# Altium PCB LowerPlumbingBayBoardPCB.PcbDoc (part 1 of 2)
Units mm, origin at the board's own origin, x right, y up, seen from the top; angles counter-clockwise.
Board outline 88.9 x 76.2 mm, 4 copper layers (Top Layer, GND, PWR, Bottom Layer), stack 1.586 mm thick; 63 components, 48 nets, 259 pads, 203 vias.
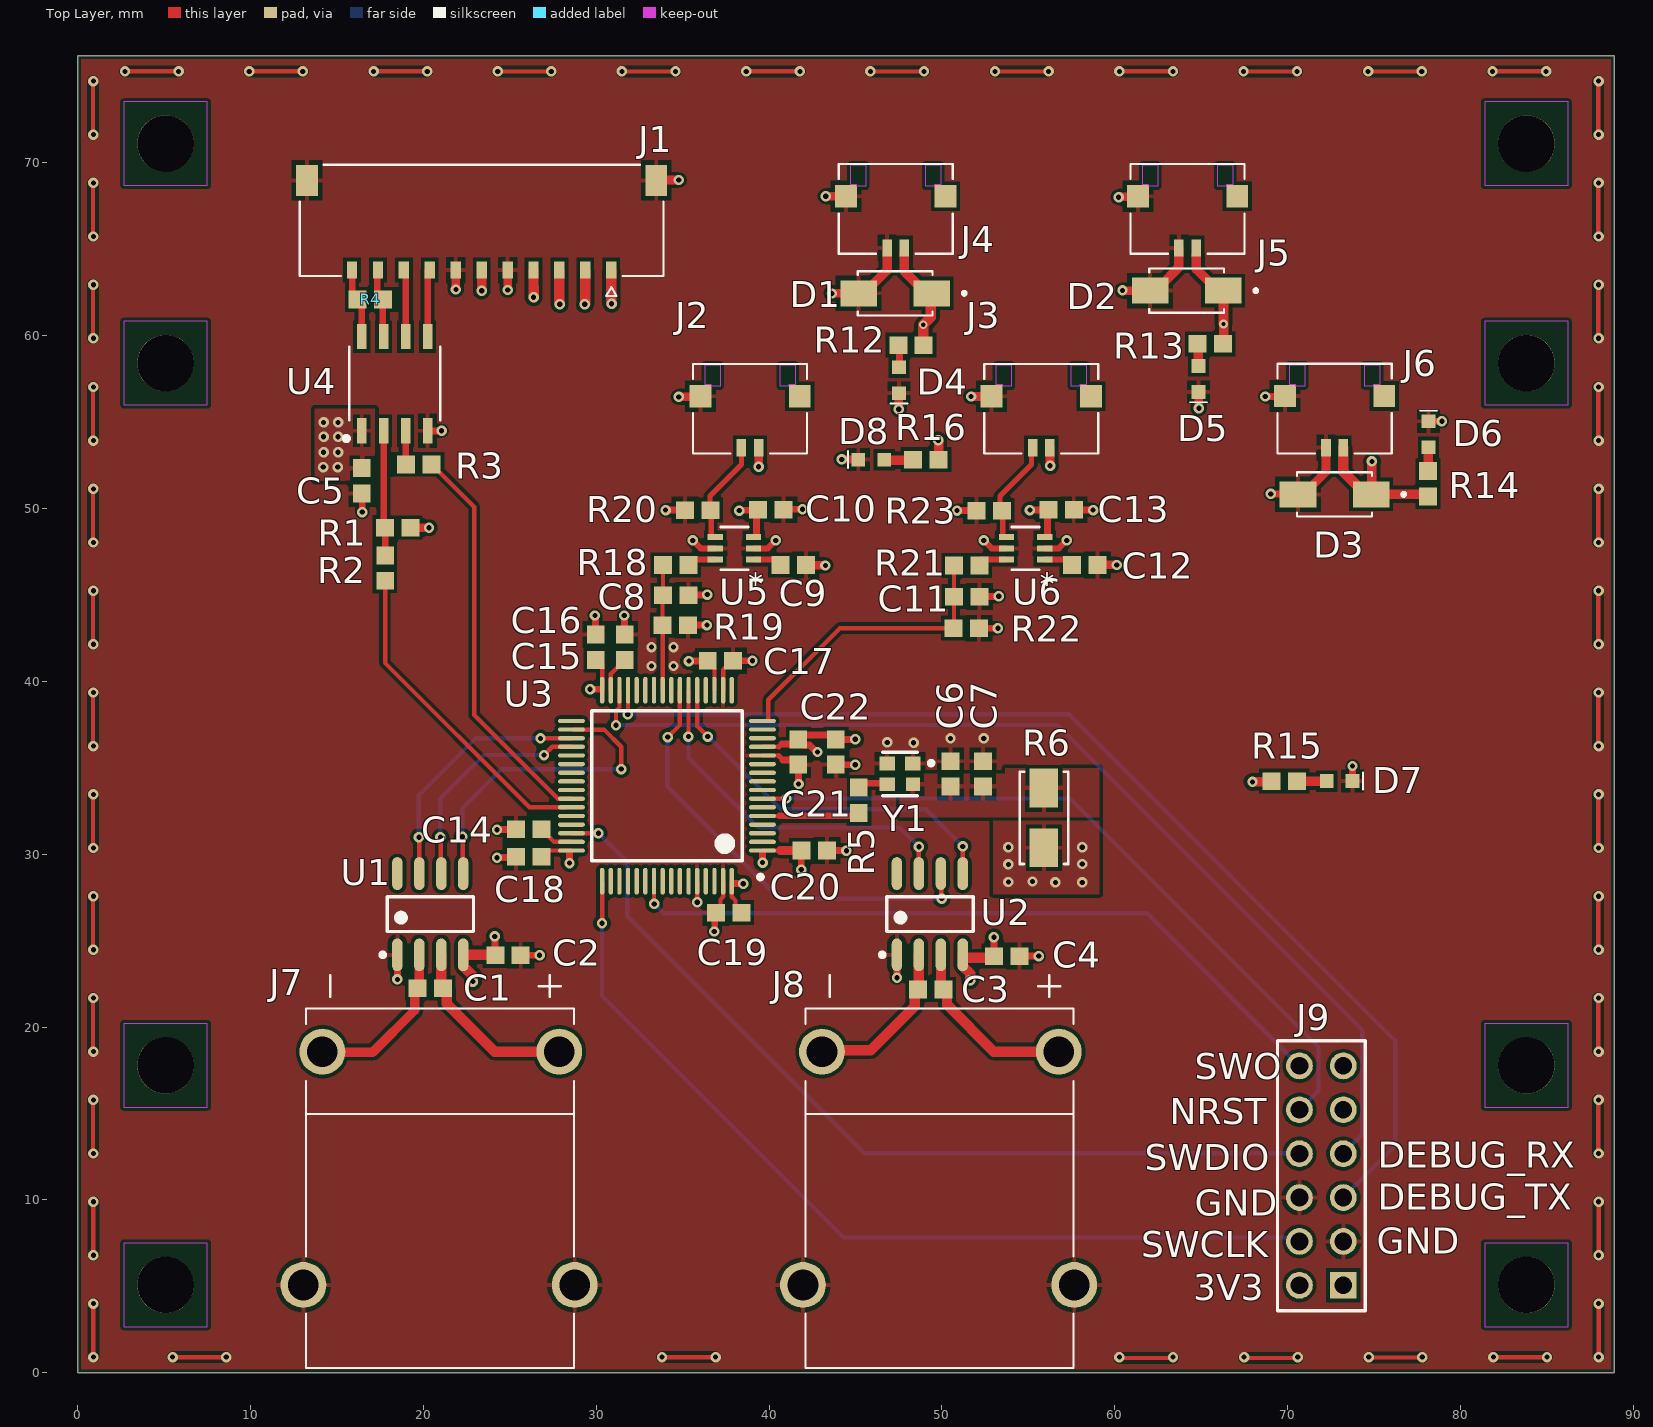
[diagram p0: Top Layer view]
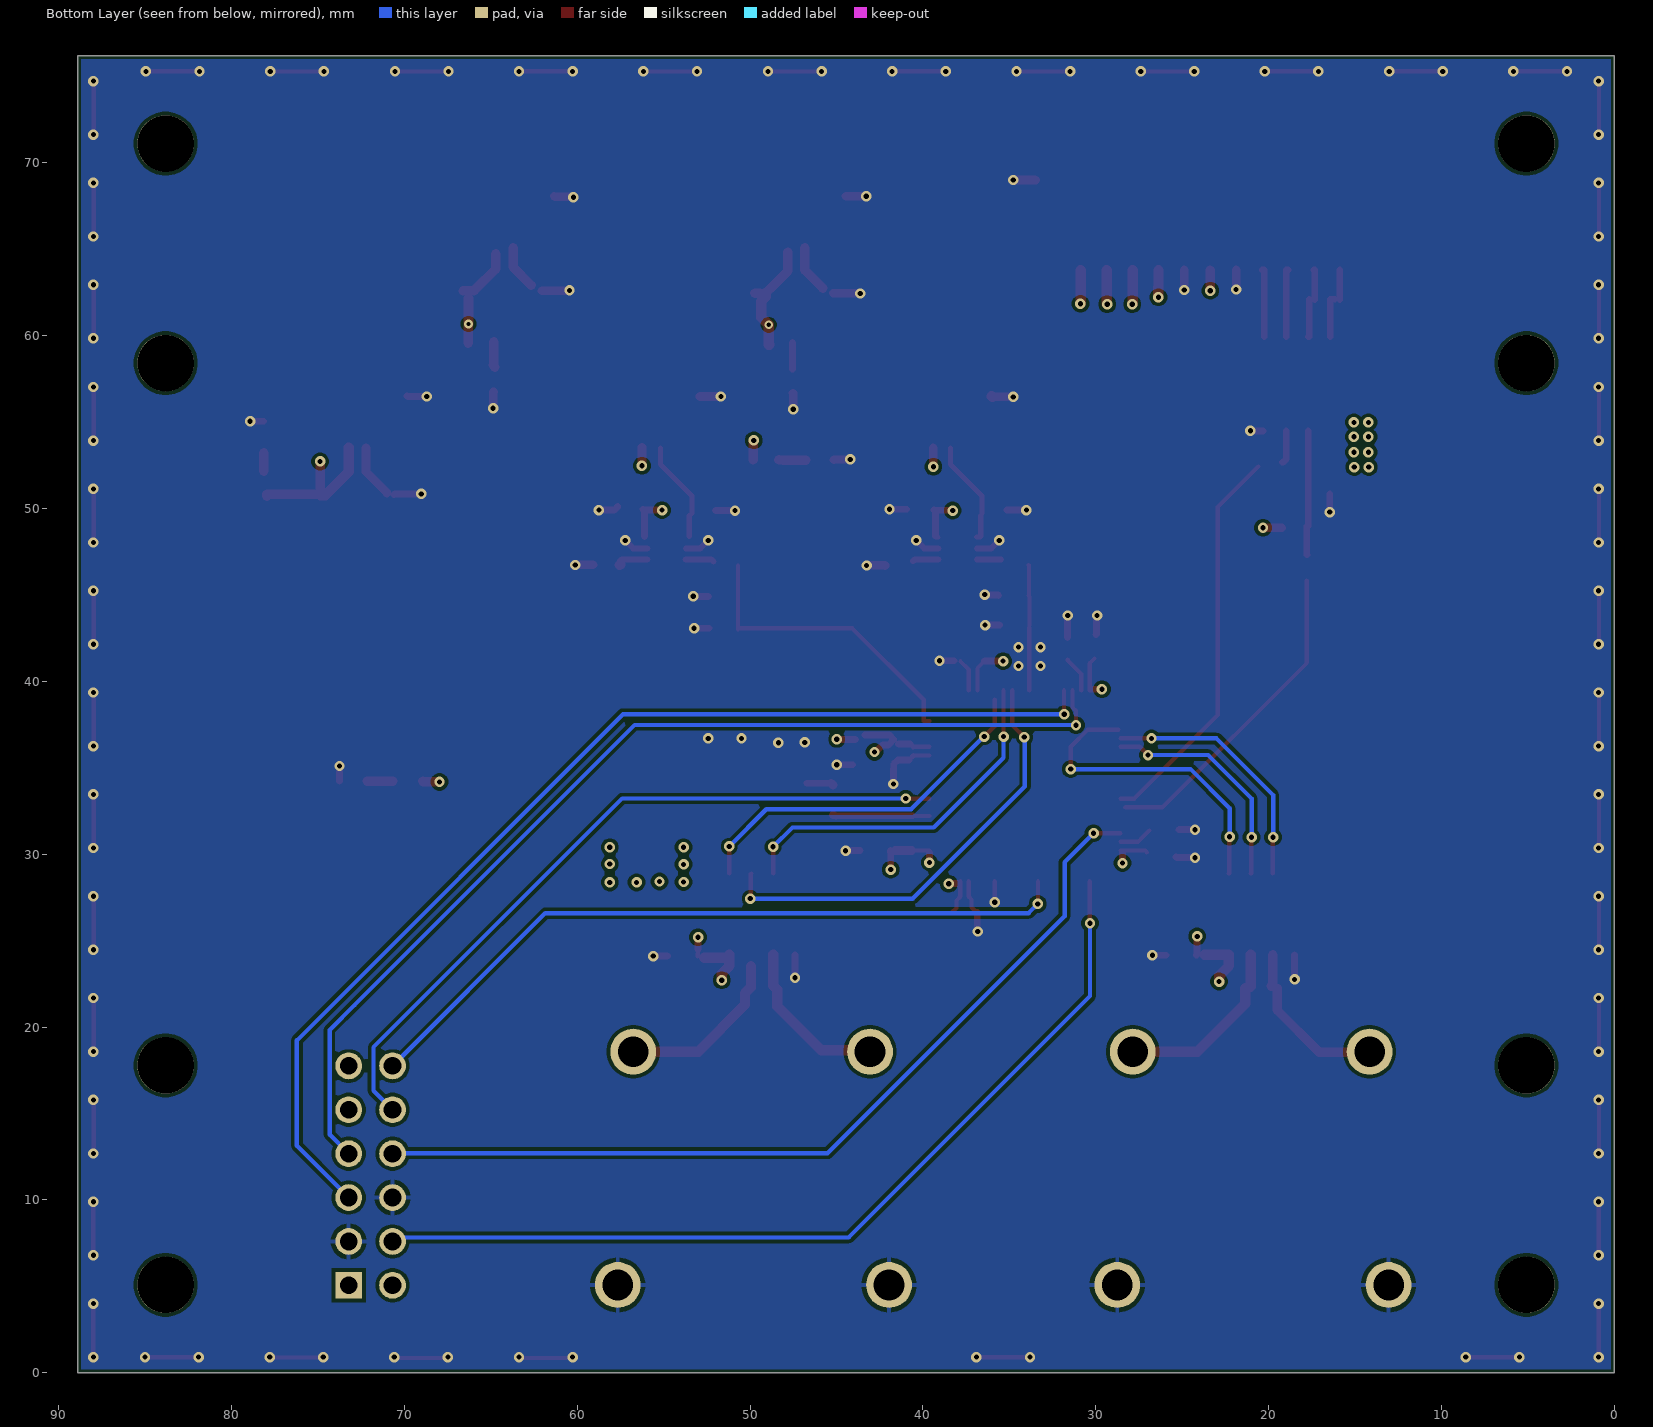
[diagram p1: Bottom Layer view, seen from below]
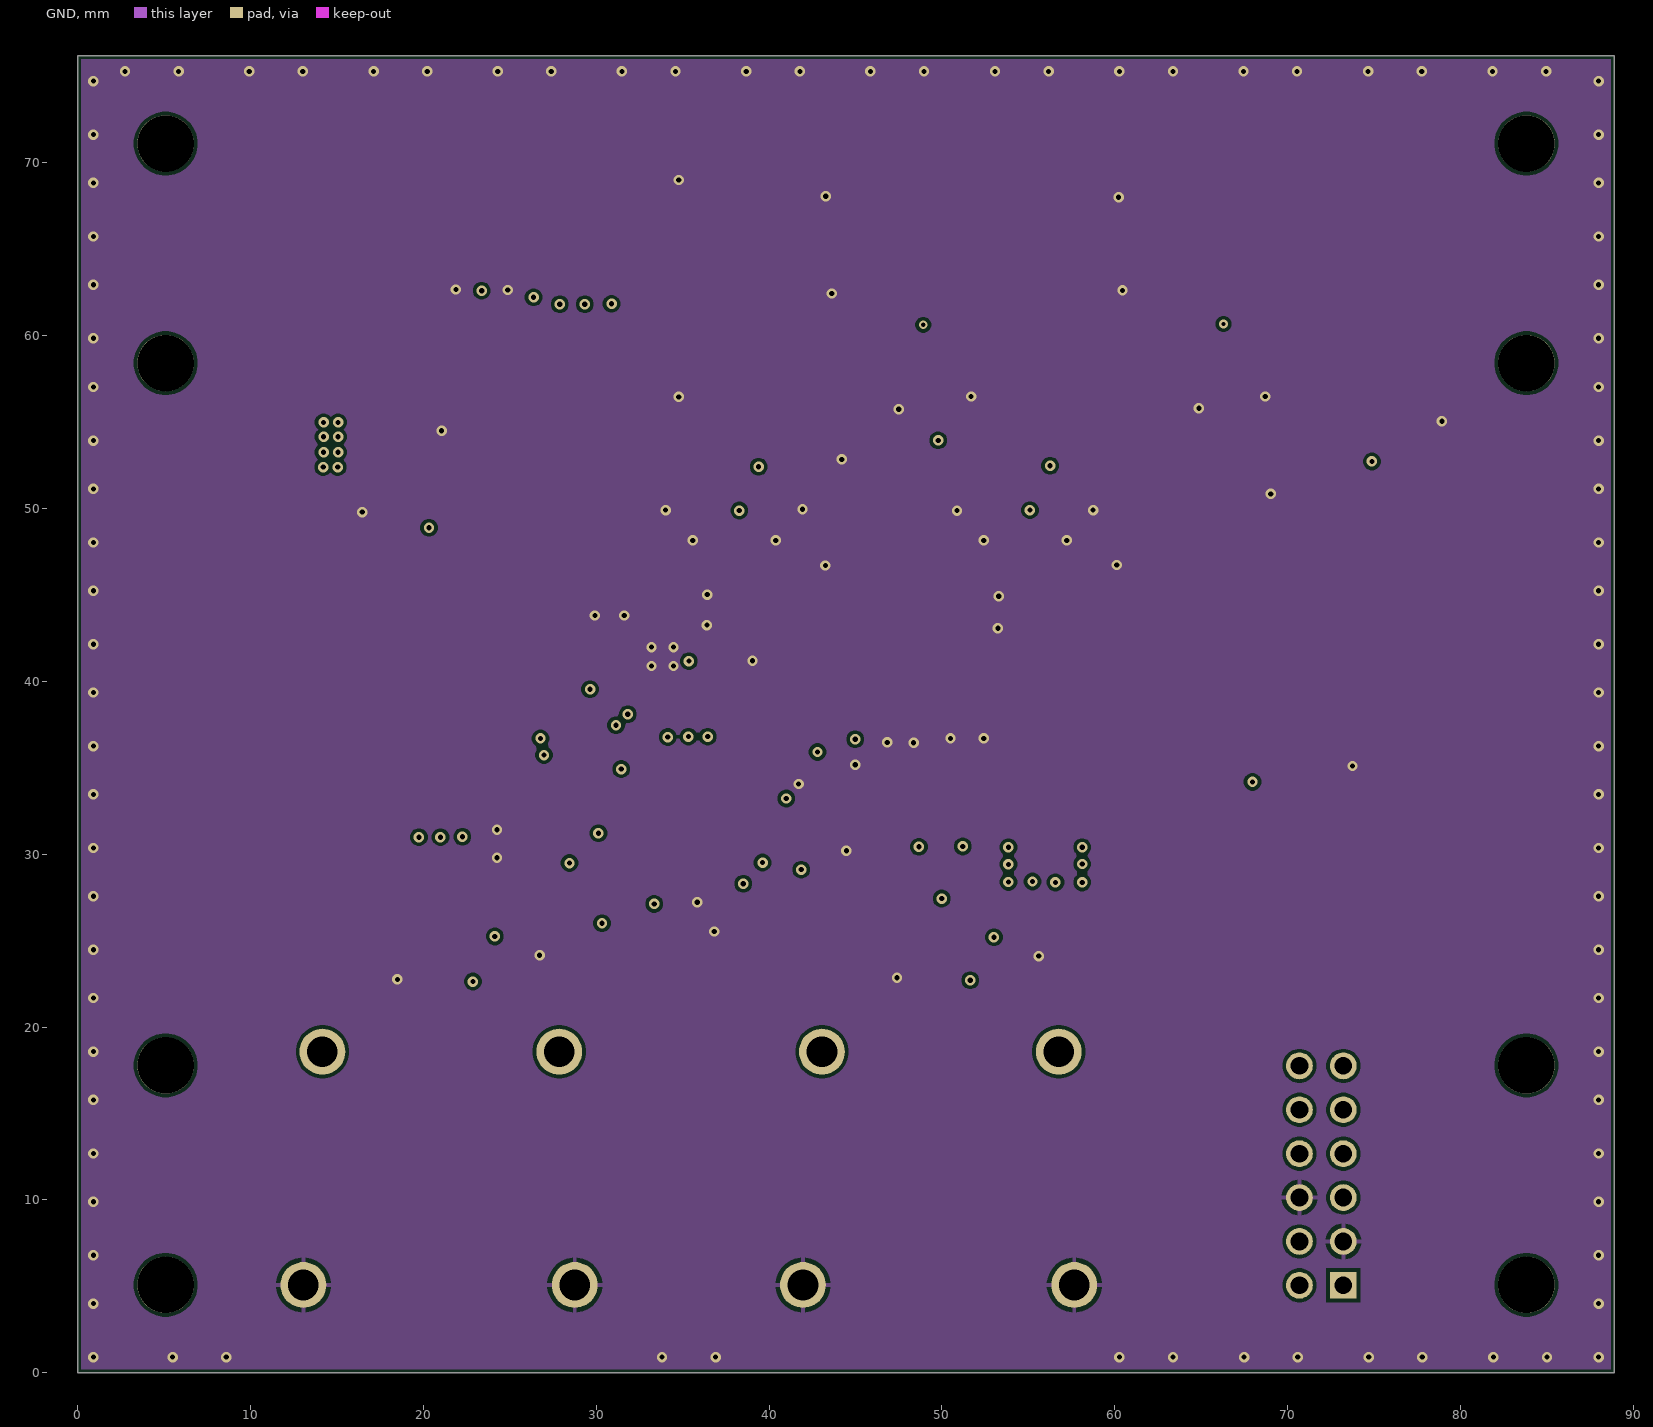
[diagram p2: GND]
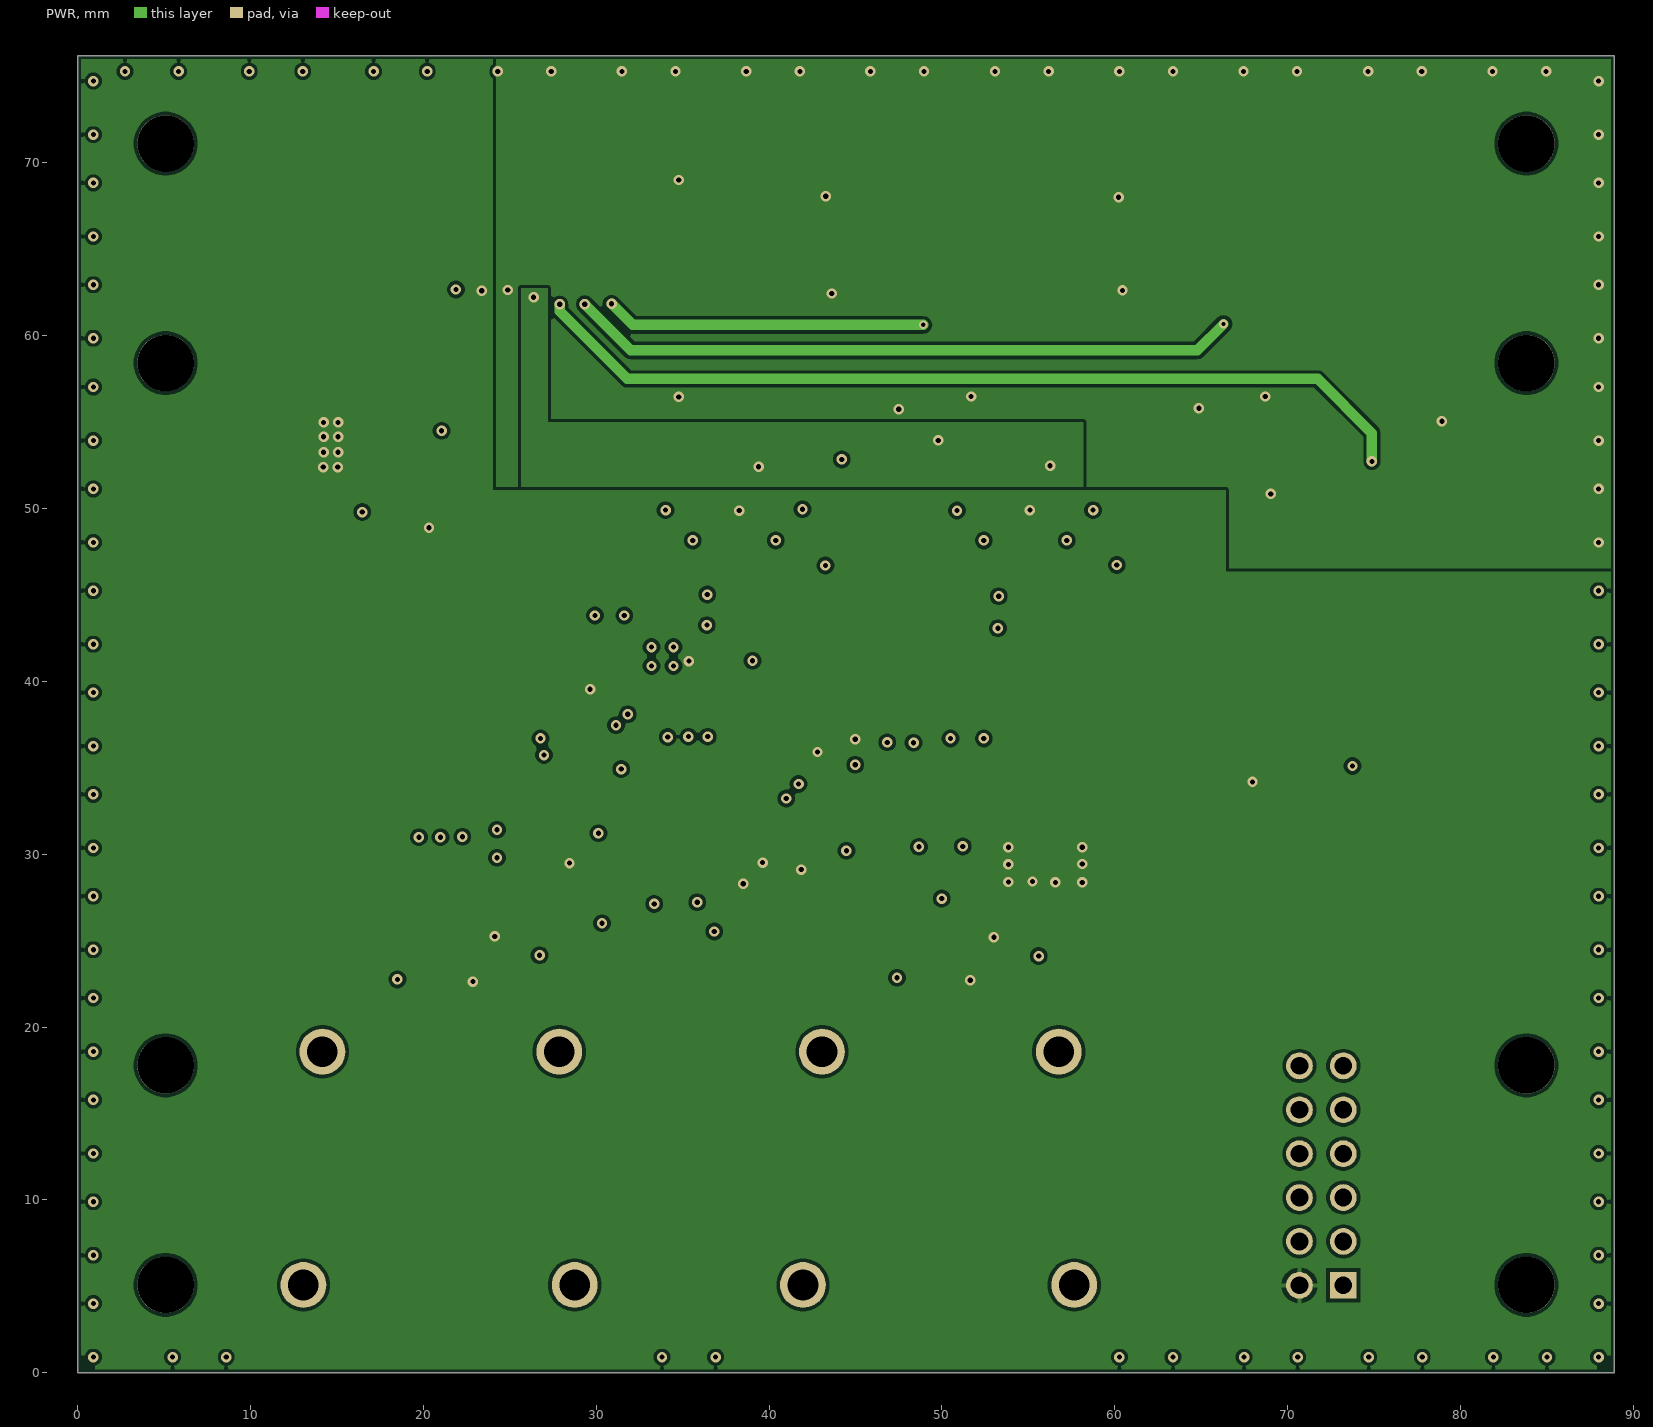
[diagram p3: PWR]
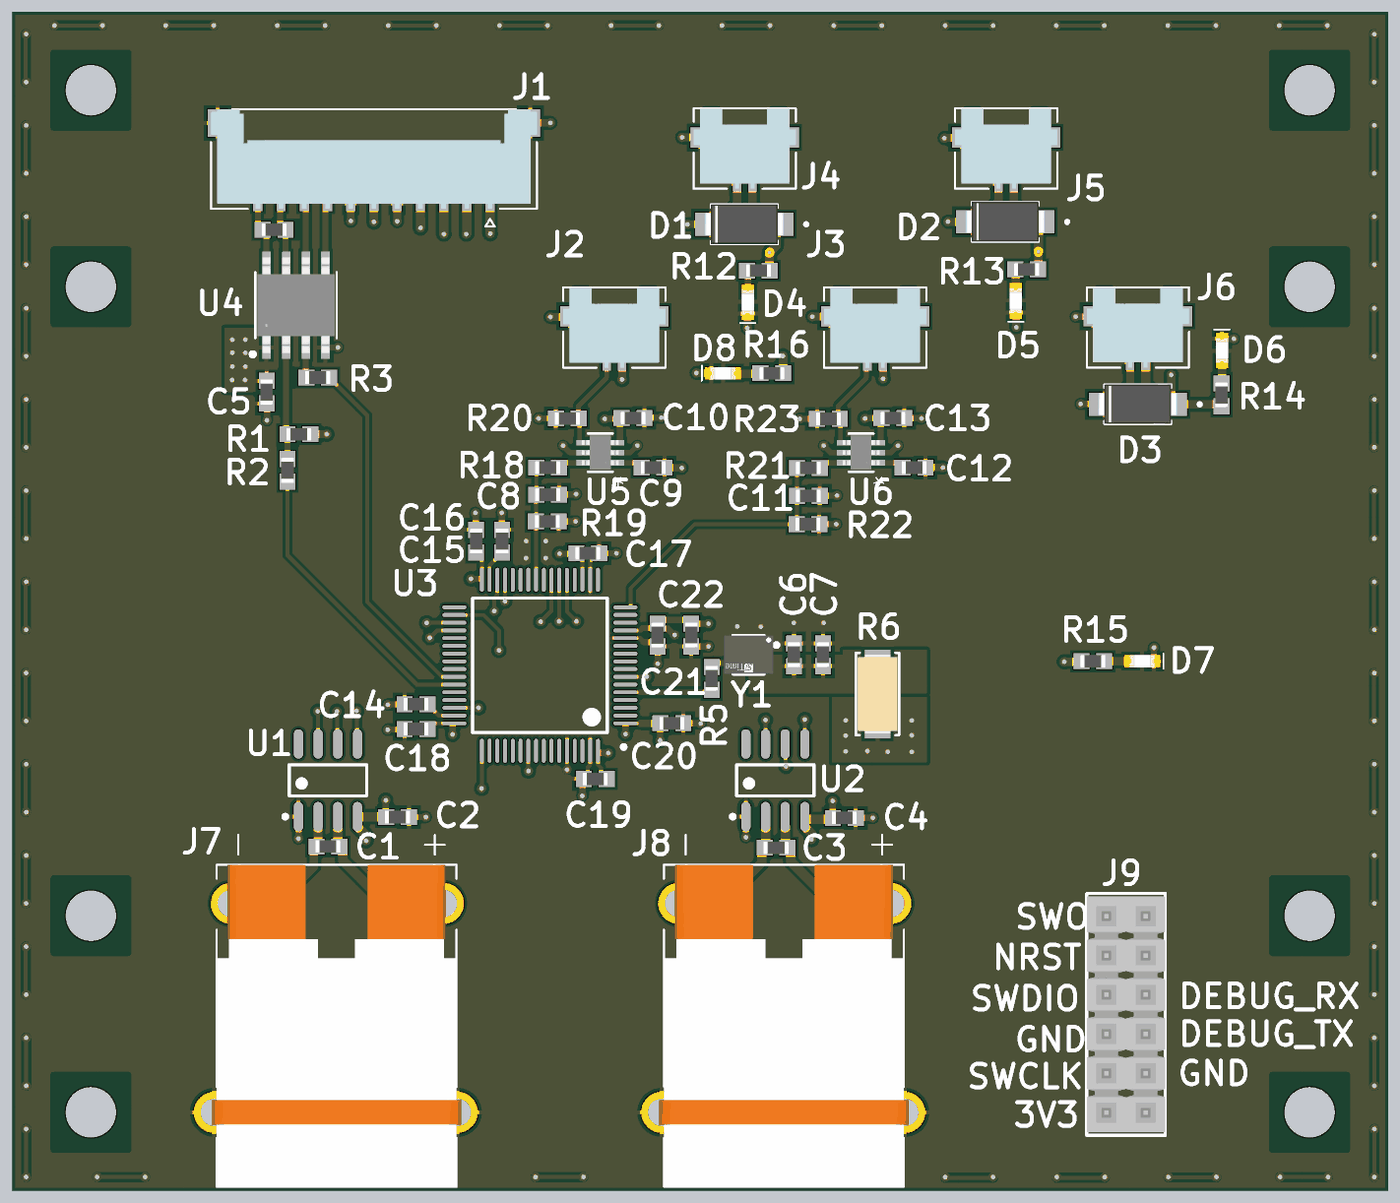
[diagram p4: 3D render of the assembled board from above, using the file's embedded part models]

## Layer stack, top to bottom
Top Solder: solder mask 0.0127, Solder Resist, Dk 3.8
Top Layer: signal copper 0.035
Dielectric 1: prepreg 0.2104, 7628, Dk 4.4
GND: signal copper 0.0152
Core: core 1.065, FR-4, Dk 4.6
PWR: signal copper 0.0152
Dielectric 2: prepreg 0.2104, 7628, Dk 4.4
Bottom Layer: signal copper 0.035
Bottom Solder: solder mask 0.0127, Solder Resist, Dk 3.8

## Board outline
0,0 0,76.2 88.9,76.2 88.9,0

## Design rules (kind name [scope] priority, off if disabled: settings)
BoardOutlineClearance [All] p1: gap=0.2 ignorepadtopadclearanceinfootprint=FALSE
Clearance [All] p1: gap=0.2 ignorepadtopadclearanceinfootprint=TRUE
ComponentClearance [All] p1: gap=0.102 collisioncheckmode=3 verticalgap=0.102 showdistances=TRUE
DiffPairsRouting [All] p1: maxlimit=0.254 minlimit=0.254 mostfreqgap=0.254 toplayer_minwidth=0.381 toplayer_maxwidth=0.381 toplayer_prefwidth=0.381 midlayer1_minwidth=0.381 midlayer1_maxwidth=0.381 midlayer1_prefwidth=0.381 midlayer2_minwidth=0.381 midlayer2_maxwidth=0.381 midlayer2_prefwidth=0.381 bottomlayer_minwidth=0.381 bottomlayer_maxwidth=0.381 bottomlayer_prefwidth=0.381 maxuncoupledlength=12.7
Height [All] p1: minheight=0 maxheight=1816.048 prefheight=12.7
HoleSize [All] p1: absolutevalues=TRUE maxlimit=6.3 minlimit=0.2 maxpercent=80.000 minpercent=20.000
HoleToHoleClearance [All] p1: gap=0.25 allowstackedmicrovias=FALSE
MinimumAnnularRing [All] p1: minimumring=0.076
MinimumSolderMaskSliver [All] p1: minsoldermaskwidth=0
PlaneClearance [All] p1: clearance=0.102
PlaneConnect PlaneConnectPowerPads [InPadClass('PowerPads')] p1: planeconnectstyle=Direct reliefexpansion=0.508 reliefentries=4 reliefconductorwidth=0.254 reliefairgap=0.254
PlaneConnect [All] p2: pad.planeconnectstyle=Relief pad.reliefexpansion=0.3 pad.reliefentries=4 pad.reliefconductorwidth=0.102 pad.reliefairgap=0.102 via.planeconnectstyle=Direct via.reliefexpansion=0.3 via.reliefentries=4 via.reliefconductorwidth=0.127 via.reliefairgap=0.127
PolygonConnect Vent_Pwr [InNet('VENT_PWR')] p1: thpad.connectstyle=Relief thpad.reliefconductorwidth=0.254 thpad.reliefentries=4 thpad.polygonreliefangle="90 Angle" thpad.airgapwidth=0.254 smdpad.connectstyle=Relief smdpad.reliefconductorwidth=0.254 smdpad.reliefentries=4 smdpad.polygonreliefangle="90 Angle" smdpad.airgapwidth=0.254 via.connectstyle=Direct via.reliefconductorwidth=0.254 via.reliefentries=4 via.polygonreliefangle="90 Angle" via.airgapwidth=0.254
PolygonConnect "Top Layer 5V" [InNet('+5V')] p2: thpad.connectstyle=Relief thpad.reliefconductorwidth=0.254 thpad.reliefentries=4 thpad.polygonreliefangle="90 Angle" thpad.airgapwidth=0.254 smdpad.connectstyle=Relief smdpad.reliefconductorwidth=0.254 smdpad.reliefentries=4 smdpad.polygonreliefangle="90 Angle" smdpad.airgapwidth=0.254 via.connectstyle=Direct via.reliefconductorwidth=0.254 via.reliefentries=4 via.polygonreliefangle="90 Angle" via.airgapwidth=0.254
PolygonConnect ServoPower [InNet('SERVO_PWR')] p3: thpad.connectstyle=Relief thpad.reliefconductorwidth=0.254 thpad.reliefentries=4 thpad.polygonreliefangle="90 Angle" thpad.airgapwidth=0.254 smdpad.connectstyle=Relief smdpad.reliefconductorwidth=0.254 smdpad.reliefentries=4 smdpad.polygonreliefangle="90 Angle" smdpad.airgapwidth=0.254 via.connectstyle=Direct via.reliefconductorwidth=0.254 via.reliefentries=4 via.polygonreliefangle="90 Angle" via.airgapwidth=0.254
PolygonConnect VentPower [InNet('VENT_PWR')] p4: thpad.connectstyle=Direct thpad.reliefconductorwidth=0.254 thpad.reliefentries=4 thpad.polygonreliefangle="90 Angle" thpad.airgapwidth=0.254 smdpad.connectstyle=Relief smdpad.reliefconductorwidth=0.254 smdpad.reliefentries=4 smdpad.polygonreliefangle="90 Angle" smdpad.airgapwidth=0.254 via.connectstyle=Direct via.reliefconductorwidth=0.254 via.reliefentries=4 via.polygonreliefangle="90 Angle" via.airgapwidth=0.254
PolygonConnect Power12V [InNet('+12')] p5: thpad.connectstyle=Relief thpad.reliefconductorwidth=0.254 thpad.reliefentries=4 thpad.polygonreliefangle="90 Angle" thpad.airgapwidth=0.254 smdpad.connectstyle=Relief smdpad.reliefconductorwidth=0.254 smdpad.reliefentries=4 smdpad.polygonreliefangle="90 Angle" smdpad.airgapwidth=0.254 via.connectstyle=Direct via.reliefconductorwidth=0.254 via.reliefentries=4 via.polygonreliefangle="90 Angle" via.airgapwidth=0.254
PolygonConnect DrainPower [InNet('DRAIN_PWR')] p6: thpad.connectstyle=Relief thpad.reliefconductorwidth=0.254 thpad.reliefentries=4 thpad.polygonreliefangle="90 Angle" thpad.airgapwidth=0.254 smdpad.connectstyle=Relief smdpad.reliefconductorwidth=0.254 smdpad.reliefentries=4 smdpad.polygonreliefangle="90 Angle" smdpad.airgapwidth=0.254 via.connectstyle=Direct via.reliefconductorwidth=0.254 via.reliefentries=4 via.polygonreliefangle="90 Angle" via.airgapwidth=0.254
PolygonConnect Servo12V [InNet('SERVO_12V')] p7: thpad.connectstyle=Relief thpad.reliefconductorwidth=0.254 thpad.reliefentries=4 thpad.polygonreliefangle="90 Angle" thpad.airgapwidth=0.254 smdpad.connectstyle=Relief smdpad.reliefconductorwidth=0.254 smdpad.reliefentries=4 smdpad.polygonreliefangle="90 Angle" smdpad.airgapwidth=0.254 via.connectstyle=Direct via.reliefconductorwidth=0.254 via.reliefentries=4 via.polygonreliefangle="90 Angle" via.airgapwidth=0.254
PolygonConnect PowerConnectionServo [InNet('SERVO_12V')] p8: connectstyle=Relief reliefconductorwidth=0.254 reliefentries=4 polygonreliefangle="90 Angle" airgapwidth=0.254
PolygonConnect PowerConnectionGND [InNet('GND')] p9: thpad.connectstyle=Relief thpad.reliefconductorwidth=0.254 thpad.reliefentries=4 thpad.polygonreliefangle="90 Angle" thpad.airgapwidth=0.254 smdpad.connectstyle=Relief smdpad.reliefconductorwidth=0.254 smdpad.reliefentries=4 smdpad.polygonreliefangle="90 Angle" smdpad.airgapwidth=0.254 via.connectstyle=Direct via.reliefconductorwidth=0.254 via.reliefentries=4 via.polygonreliefangle="90 Angle" via.airgapwidth=0.254
PolygonConnect PowerConnection5V [InNet('+5V')] p10: connectstyle=Relief reliefconductorwidth=0.254 reliefentries=4 polygonreliefangle="90 Angle" airgapwidth=0.254
PolygonConnect TOP_3V3 [InNet('+3V3')] p11: thpad.connectstyle=Relief thpad.reliefconductorwidth=0.254 thpad.reliefentries=4 thpad.polygonreliefangle="90 Angle" thpad.airgapwidth=0.254 smdpad.connectstyle=Relief smdpad.reliefconductorwidth=0.254 smdpad.reliefentries=4 smdpad.polygonreliefangle="90 Angle" smdpad.airgapwidth=0.2 via.connectstyle=Direct via.reliefconductorwidth=0.254 via.reliefentries=4 via.polygonreliefangle="90 Angle" via.airgapwidth=0.254
PolygonConnect Oscillator [InNet('NetC6_2')] p12: thpad.connectstyle=Relief thpad.reliefconductorwidth=0.254 thpad.reliefentries=4 thpad.polygonreliefangle="90 Angle" thpad.airgapwidth=0.254 smdpad.connectstyle=Relief smdpad.reliefconductorwidth=0.254 smdpad.reliefentries=4 smdpad.polygonreliefangle="90 Angle" smdpad.airgapwidth=0.254 via.connectstyle=Direct via.reliefconductorwidth=0.254 via.reliefentries=4 via.polygonreliefangle="90 Angle" via.airgapwidth=0.254
RoutingVias [All] p1: holewidth=0.3 width=0.6 viastyle="Through Hole" minholewidth=0.2 minwidth=0.45 maxholewidth=6.3 maxwidth=6.55
SilkToSilkClearance [All] p1: silktosilkclearance=0
SilkToSolderMaskClearance [IsPad] p1: minsilkscreentomaskgap=0.102 clearancetoexposedcopper=TRUE
SolderMaskExpansion [All] p1: expansion=0.075 istentingtop=FALSE
SupplyNets "Schematic Supply Nets_2" [InNet('+12')] p1: voltage=0.000
SupplyNets "Schematic Supply Nets_1" [InNet('GND')] p2: voltage=0.000
SupplyNets "Schematic Supply Nets" [InNet('+3V3')] p3: voltage=0.000
UnRoutedNet [All] p1: checkbadconnections=TRUE
Width [All] p1: maxlimit=1 minlimit=0.2 preferedwidth=0.3 minimp=50.000000 maximp=50.000000 favimp=50.000000
19 further rules are at their usual default settings.

## Classes and differential pairs
differential pair TX: +TX_P -TX_N
differential pair RX: +RX_P -RX_N

## Components (designator, comment, footprint, x,y, rotation, side; value= is the part's Value field where it differs from the comment)
C1 "06035A103JAT2A" 0603 20.396,22.25 r180 top
C2 "CGA3E2X7R1E104K080AA" 0603 24.892,24.155 r0 top
C3 "06035A103JAT2A" 0603 49.352,22.174 r180 top
C4 "CGA3E2X7R1E104K080AA" 0603 53.755,24.105 r0 top
C5 "CGA3E2X7R1E104K080AA" 0603 16.434,51.613 r270 top
C6 "CGA3E2X7R1E104K080AA" 0603 50.495,34.646 r270 top
C7 "CL10A105KP8NNNC" 0603 52.375,34.646 r270 top
C8 "06031C471JAZ2A" 0603 34.595,44.983 r0 top
C9 "06035A103JAT2A" 0603 41.402,46.736 r0 top
C10 "CGA3E2X7R1E104K080AA" 0603 40.107,49.936 r0 top
C11 "06031C471JAZ2A" 0603 51.435,44.907 r0 top
C12 "06035A103JAT2A" 0603 58.268,46.736 r0 top
C13 "CGA3E2X7R1E104K080AA" 0603 56.896,49.936 r0 top
C14 "C1608X5R1C225K080AB" 0603 26.086,31.445 r180 top
C15 "C1608X5R1C225K080AB" 0603 31.648,41.986 r270 top
C16 "CGA3EDX7T1A106M080AU" 0603 29.972,41.986 r90 top
C17 "CGA3E2X7R1E104K080AA" 0603 37.186,41.199 r0 top
C18 "CGA3E2X7R1E104K080AA" 0603 26.086,29.845 r180 top
C19 "CGA3E2X7R1E104K080AA" 0603 37.668,26.619 r180 top
C20 "CGA3E2X7R1E104K080AA" 0603 42.614,30.215 r0 top
C21 "CL10A105KP8NNNC" 0603 41.689,35.915 r270 top
C22 "06035A103JAT2A" 0603 43.866,35.916 r270 top
D1 "SS14" DIOM4325X250N 47.295,62.459 r180 top
D2 "SS14" DIOM4325X250N 64.16,62.611 r180 top
D3 "SS14" DIOM4325X250N 72.72,50.825 r180 top
D4 "LTST-C191KGKT" LTST-C191KGKT 47.523,57.429 r90 top
D5 "LTST-C191KGKT" LTST-C191KGKT 64.846,57.506 r90 top
D6 "LTST-C191KGKT" LTST-C191KGKT 78.156,54.305 r270 top
D7 "LTST-C191KGKT" LTST-C191KGKT 73.014,34.23 r180 top
D8 "LTST-C191KGKT" LTST-C191KGKT 45.91,52.832 r0 top
J1 "5040501191" MOLEX_5040501191 23.368,66.675 r0 top locked
J2 "5037630291" 2MOLEX_5037630291 38.9,55.778 r0 top locked
J3 "5037630291" 2MOLEX_5037630291 55.75,55.778 r0 top locked
J4 "5037630291" 2MOLEX_5037630291 47.325,67.347 r0 top locked
J5 "5037630291" 2MOLEX_5037630291 64.216,67.347 r0 top locked
J6 "5037630291" 2MOLEX_5037630291 72.725,55.79 r0 top locked
J7 "PCC-SMP-T-5" OMEGA_PCC-SMP-K-5 20.955,10.675 r270 top locked
J8 "PCC-SMP-T-5" OMEGA_PCC-SMP-K-5 49.86,10.675 r270 top
J9 "TSW-106-07-G-D" SMTC-TSW-106-07-X-D 73.228,5.055 r90 top
R1 "ERJ-3GEYJ103V" 0603 18.517,48.895 r0 top
R2 "RC0603JR-070RL" 0603 17.78,46.56 r90 top value=0R
R3 "RC0603JR-070RL" 0603 19.736,52.553 r180 top value=0R
R4 "RC0201FR-0788R7L" 0603 16.916,62.103 r180 top
R5 "ERJ-P03F22R1V" 0603 45.189,33.115 r90 top
R6 "PWR2010W5R00JE" BO_PWR2010 55.905,32.106 r270 top
R12 "RT0603BRC07500RL" 0603 48.209,59.461 r180 top
R13 "RT0603BRC07500RL" 0603 65.532,59.538 r180 top
R14 "RT0603BRC07500RL" 0603 78.13,51.435 r90 top
R15 "ERJ-P03F1000V" 0603 69.814,34.23 r0 top
R16 "RT0603BRC07500RL" 0603 49.073,52.832 r180 top
R18 "ERJ-H3EF1301V" 0603 34.595,46.736 r180 top
R19 "ERJ-3GEYJ103V" 0603 34.569,43.256 r180 top
R20 "ERJ-3RQF3R0V" 0603 35.865,49.911 r180 top
R21 "ERJ-H3EF1301V" 0603 51.435,46.711 r180 top
R22 "ERJ-3GEYJ103V" 0603 51.41,43.078 r180 top
R23 "ERJ-3RQF3R0V" 0603 52.73,49.886 r180 top
U1 "MAX31855KASA+T" MAXM-S8+4_L 20.396,26.531 r90 top
U2 "MAX31855KASA+T" MAXM-S8+4_L 49.301,26.531 r90 top
U3 "STM32F405RGT6" STM-LQFP64_L 34.089,33.965 r180 top locked
U4 "SN65HVD1477DR" D8_TEX 18.333,57.229 r90 top
U5 "TSC213ICT" SC70-6_STM 37.992,47.701 r180 top
U6 "TSC213ICT" SC70-6_STM 54.839,47.701 r180 top
Y1 "SIT8920BM-73-33N-8.000000" FP-SIT8920BM-73-33N-8_000-MFG 47.574,34.646 r180 top

## Footprints (in the part's own frame and the unit in brackets; to place one, negate y for a bottom-side part, rotate by r counter-clockwise, add the part's x,y. Pads: shape width x height; smd on the part's side, far side on the other; paste and mask are expansions set on the pad)
2MOLEX_5037630291 [mm]
  rect 0.55x1 smd mask+0.076: 1(0.5,-2.265) 2(-0.5,-2.265)
  rect 1.26x1.3 smd mask+0.076: S1(2.875,0.725) S2(-2.875,0.725)
  Top Layer keep-out region: 2.605,1.38 2.24,1.38 2.24,1.295 1.735,1.295 1.735,2.545 2.605,2.545
  Top Layer keep-out region: -1.735,1.295 -2.24,1.295 -2.24,1.38 -2.605,1.38 -2.605,2.545 -1.735,2.545
  silkscreen extent -3.3,-2.6 3.3,2.6, body extent -3.3,-2.59 3.3,2.6, height 1.42
0603 [mm]
  rect 1.04x1.02 smd: 1(-0.735,0) 2(0.735,0)
  body extent -0.8,-0.4 0.8,0.4, height 0.55
BO_PWR2010 [mm]
  rect 2.25x1.651 smd paste+0 mask+0: 1(-1.73,0) 2(1.73,0)
  silkscreen extent -2.67,-1.4 2.67,1.4, body extent -2.54,-1.27 2.54,1.27, height 3.25
D8_TEX [mil]
  rect 57.5x22 smd paste+0 mask+0: 1(-107.25,75) 2(-107.25,25) 3(-107.25,-25) 4(-107.25,-75) 5(107.25,-75) 6(107.25,-25) 7(107.25,25) 8(107.25,75)
  silkscreen extent -130,-104 84,115, body extent -122,-99 122,99, height 69
DIOM4325X250N [mm]
  rect 2.12x1.5 smd: A(2.115,0) C(-2.115,0)
  silkscreen extent -4.1,-1.28 2.16,1.28, body extent -2.57,-1.29 2.57,1.27, height 2.5
FP-SIT8920BM-73-33N-8_000-MFG [mm]
  rect 0.9x0.8 smd paste+0 mask+0: 1(-0.75,-0.6) 2(0.75,-0.6) 3(0.75,0.6)
  rect 0.8x0.8 smd paste-3 mask+0.05: 4(-0.75,0.6)
  silkscreen extent -1.92,-1.25 1,1.25, body extent -1.3,-1.1 1.3,1.1, height 0.25
LTST-C191KGKT [mm] "Green 571nm LED Indication - Discrete 2V 0603"
  rect 0.8x0.8 smd paste-3 mask+0.05: 1(-0.75,0) 2(0.75,0)
  silkscreen extent -1.35,-0.5 -1.35,0.5, body extent -0.8,-0.4 0.8,0.4, height 0.8
MAXM-S8+4_L [mm] "SOIC, 8-Leads, Body 4.9x3.9mm, Pitch 1.27mm, IPC High Density"
  oval 1.9x0.6 smd: U1(-2.35,1.905) U2(-2.35,0.635) U3(-2.35,-0.635) U4(-2.35,-1.905) U5(2.35,-1.905) U6(2.35,-0.635) U7(2.35,0.635) U8(2.35,1.905)
  silkscreen extent -2.47,-2.5 1,2.88, body extent -2,-2.5 2,2.5, height 1.75
MOLEX_5040501191 [mm]
  rect 0.6x1 smd mask+0.076: 1(7.5,-2.87) 2(6,-2.87) 3(4.5,-2.87) 4(3,-2.87) 5(1.5,-2.87) 6(0,-2.87) 7(-1.5,-2.87) 8(-3,-2.87) 9(-4.5,-2.87) 10(-6,-2.87) 11(-7.5,-2.87)
  rect 1.25x1.8 smd mask+0.076: S1(10.105,2.32) S2(-10.105,2.32)
  silkscreen extent -10.53,-4.37 10.53,3.22, body extent -10.53,-3.22 10.53,3.22, height 2
OMEGA_PCC-SMP-K-5 [mm]
  round 2.655 hole 1.77: N(-7.9,-6.8) P(-7.9,6.9) S1(5.6,7.8) S2(5.6,-7.9)
  silkscreen extent -12.33,-7.75 10.4,7.75, body extent -10.4,-8.05 10.4,8.05, height 6.6
SC70-6_STM [mil]
  rect 34.5x14 smd paste+0 mask+0: 1(-43.75,25.59) 2(-43.75,0) 3(-43.75,-25.59) 4(43.75,-25.59) 5(43.75,0) 6(43.75,25.59)
  silkscreen extent -32,-49 32,49, body extent -47,-44 47,44, height 41
SMTC-TSW-106-07-X-D [mm] ".025 SQ Post Terminal Strip Assembly, 2x6 Pins, Vertical, 2.54mm Pitch, Male"
  rect 1.55x1.55 hole 1.02: 1(0,0)
  round 1.55 hole 1.02: 2(0,2.54) 3(2.54,0) 4(2.54,2.54) 5(5.08,0) 6(5.08,2.54) 7(7.62,0) 8(7.62,2.54) 9(10.16,0) 10(10.16,2.54) 11(12.7,0) 12(12.7,2.54)
  silkscreen extent -1.46,-1.27 14.16,3.81, body extent -1.27,-1.27 13.97,3.81, height 8.38
STM-LQFP64_L [mm] "Thin QFP, 64-Leads, Body 10x10mm, Pitch 0.5mm, IPC High Density"
  oval 1.55x0.25 smd: 1(-5.525,3.75) 2(-5.525,3.25) 3(-5.525,2.75) 4(-5.525,2.25) 5(-5.525,1.75) 6(-5.525,1.25) 7(-5.525,0.75) 8(-5.525,0.25) 9(-5.525,-0.25) 10(-5.525,-0.75) 11(-5.525,-1.25) 12(-5.525,-1.75) 13(-5.525,-2.25) 14(-5.525,-2.75) 15(-5.525,-3.25) 16(-5.525,-3.75) 33(5.525,-3.75) 34(5.525,-3.25) 35(5.525,-2.75) 36(5.525,-2.25) 37(5.525,-1.75) 38(5.525,-1.25) 39(5.525,-0.75) 40(5.525,-0.25) 41(5.525,0.25) 42(5.525,0.75) 43(5.525,1.25) 44(5.525,1.75) 45(5.525,2.25) 46(5.525,2.75) 47(5.525,3.25) 48(5.525,3.75)
  oval 0.25x1.55 smd: 17(-3.75,-5.525) 18(-3.25,-5.525) 19(-2.75,-5.525) 20(-2.25,-5.525) 21(-1.75,-5.525) 22(-1.25,-5.525) 23(-0.75,-5.525) 24(-0.25,-5.525) 25(0.25,-5.525) 26(0.75,-5.525) 27(1.25,-5.525) 28(1.75,-5.525) 29(2.25,-5.525) 30(2.75,-5.525) 31(3.25,-5.525) 32(3.75,-5.525) 49(3.75,5.525) 50(3.25,5.525) 51(2.75,5.525) 52(2.25,5.525) 53(1.75,5.525) 54(1.25,5.525) 55(0.75,5.525) 56(0.25,5.525) 57(-0.25,5.525) 58(-0.75,5.525) 59(-1.25,5.525) 60(-1.75,5.525) 61(-2.25,5.525) 62(-2.75,5.525) 63(-3.25,5.525) 64(-3.75,5.525)
  silkscreen extent -5.54,-4.35 4.35,5.41, body extent -5,-5 5,5, height 1.6

## Part data
C1: "Multilayer Ceramic Capacitors MLCC - SMD/SMT .01UF 50V 5% 0603", Capacitance=0.01uF, Manufacturer="TDK Corporation", Manufacturer Part Number=CGA3E2X7R1H103K080AA, Operating Temperature="-55°C ~ 125°C", Package / Case="0603 (1608 Metric)", Temperature Coefficient=X7R, Tolerance=±10%, Voltage - Rated=50V, Mounting Type="Surface Mount, MLCC", Size / Dimension="0.063\" L x 0.031\" W (1.60mm x 0.80mm)", Thickness (Max)="0.035\" (0.90mm)"
C2 C4 C5 C6 C10 C13 C17 C18 C19 C20: "CAP CER 0.1UF 25V X7R 0603", Capacitance=0.1µF, Manufacturer="TDK Corporation", Operating Temperature="-55°C ~ 125°C", Package / Case="0603 (1608 Metric)", Supplier Part Number 1=445-5667-1-ND, Temperature Coefficient=X7R, Tolerance=±10%, Voltage - Rated=25V, ComponentLink1description=Datasheet, ComponentLink1URL=https://product.tdk.com/info/en/catalog/spec/mlccspec_automotive_general_en.pdf, Manufacturer Part Number=CGA3E2X7R1E104K080AA, Mounting Type="Surface Mount, MLCC", Size / Dimension="0.063\" L x 0.031\" W (1.60mm x 0.80mm)", Supplier 1=Digi-Key, Thickness (Max)="0.035\" (0.90mm)"
C3 C22: "Multilayer Ceramic Capacitors MLCC - SMD/SMT .01UF 50V 5% 0603", Capacitance=0.01uF, Manufacturer="TDK Corporation", Manufacturer Part Number=CGA3E2X7R1H103K080AA, Operating Temperature="-55°C ~ 125°C", Package / Case="0603 (1608 Metric)", Supplier Part Number 1=445-5662-1-ND, Temperature Coefficient=X7R, Tolerance=±10%, Voltage - Rated=50V, ComponentLink1description=Datasheet, ComponentLink1URL=https://product.tdk.com/info/en/catalog/spec/mlccspec_automotive_general_en.pdf, Mounting Type="Surface Mount, MLCC", Size / Dimension="0.063\" L x 0.031\" W (1.60mm x 0.80mm)", Supplier 1=Digi-Key, Thickness (Max)="0.035\" (0.90mm)"
C7 C21: "CAP CER 1UF 10V X5R 0603", Capacitance=1uF, Manufacturer="Samsung Electro-Mechanics", Operating Temperature="-55°C ~ 85°C", Package / Case="0603 (1608 Metric)", Supplier Part Number 1=1276-1182-1-ND, Temperature Coefficient=X5R, Tolerance=±10%, Voltage - Rated=10V, ComponentLink1description=Datasheet, ComponentLink1URL=http://www.samsungsem.com/kr/support/product-search/mlcc/__icsFiles/afieldfile/2019/05/10/19-CL10A105KP8NNNC.pdf, Manufacturer Part Number=CL10A105KP8NNNC, Mounting Type="Surface Mount, MLCC", Size / Dimension="0.063\" L x 0.031\" W (1.60mm x 0.80mm)", Supplier 1=Digi-Key, Thickness (Max)="0.035\" (0.90mm)"
C8 C11: library part CGA3E2X7R1E104K080AA, "Multilayer Ceramic Capacitors MLCC - SMD/SMT 100V 470pF X7R 0603 5% Flex Soft", Capacitance=470pF, Manufacturer="TDK Corporation", Operating Temperature="-55°C ~ 125°C", Package / Case="0603 (1608 Metric)", Supplier Part Number 1=445-5667-1-ND, Temperature Coefficient=X7R, Tolerance=±10%, Voltage - Rated=25V, ComponentLink1description=Datasheet, ComponentLink1URL=https://product.tdk.com/info/en/catalog/spec/mlccspec_automotive_general_en.pdf, Manufacturer Part Number=CGA3E2X7R1E104K080AA, Mounting Type="Surface Mount, MLCC", Size / Dimension="0.063\" L x 0.031\" W (1.60mm x 0.80mm)", Supplier 1=Digi-Key, Thickness (Max)="0.035\" (0.90mm)"
C9: "Multilayer Ceramic Capacitors MLCC - SMD/SMT .01UF 50V 5% 0603", Capacitance=0.1µF, Manufacturer="TDK Corporation", Manufacturer Part Number=CGA3E2X7R1E104K080AA, Operating Temperature="-55°C ~ 125°C", Package / Case="0603 (1608 Metric)", Supplier Part Number 1=445-5667-1-ND, Temperature Coefficient=X7R, Tolerance=±10%, Voltage - Rated=25V, ComponentLink1description=Datasheet, ComponentLink1URL=https://product.tdk.com/info/en/catalog/spec/mlccspec_automotive_general_en.pdf, Mounting Type="Surface Mount, MLCC", Size / Dimension="0.063\" L x 0.031\" W (1.60mm x 0.80mm)", Supplier 1=Digi-Key, Thickness (Max)="0.035\" (0.90mm)"
C12: "Multilayer Ceramic Capacitors MLCC - SMD/SMT .01UF 50V 5% 0603", Capacitance=0.01uF, Manufacturer="TDK Corporation", Manufacturer Part Number=CGA3E2X7R1E104K080AA, Operating Temperature="-55°C ~ 125°C", Package / Case="0603 (1608 Metric)", Supplier Part Number 1=445-5667-1-ND, Temperature Coefficient=X7R, Tolerance=±10%, Voltage - Rated=50V, ComponentLink1description=Datasheet, ComponentLink1URL=https://product.tdk.com/info/en/catalog/spec/mlccspec_automotive_general_en.pdf, Mounting Type="Surface Mount, MLCC", Size / Dimension="0.063\" L x 0.031\" W (1.60mm x 0.80mm)", Supplier 1=Digi-Key, Thickness (Max)="0.035\" (0.90mm)"
C14 C15: "CAP CER 2.2UF 16V X5R 0603", Capacitance=2.2uF, Manufacturer="TDK Corporation", Operating Temperature="-55°C ~ 85°C", Package / Case="0603 (1608 Metric)", Supplier Part Number 1=445-5157-1-ND, Temperature Coefficient=X5R, Tolerance=±10%, Voltage - Rated=16V, ComponentLink1description=Datasheet, ComponentLink1URL=https://product.tdk.com/info/en/catalog/spec/mlccspec_commercial_general_midvoltage_en.pdf, Manufacturer Part Number=C1608X5R1C225K080AB, Mounting Type="Surface Mount, MLCC", Size / Dimension="0.063\" L x 0.031\" W (1.60mm x 0.80mm)", Supplier 1=Digi-Key, Thickness (Max)="0.035\" (0.90mm)"
C16: library part CL10A106MP8NNNC, "Multilayer Ceramic Capacitors MLCC - SMD/SMT 0603,X7T,10V,10uF,+/-20%,0.8mm, AEC-Q200", Capacitance=10µF, Manufacturer="Samsung Electro-Mechanics", Operating Temperature="-55°C ~ 85°C", Package / Case="0603 (1608 Metric)", Supplier Part Number 1=1276-1871-1-ND, Temperature Coefficient=X5R, Tolerance=±20%, Voltage - Rated=10V, ComponentLink1description=Datasheet, ComponentLink1URL=https://static6.arrow.com/aropdfconversion/f91a1722e2705c3d73cfb1979021b64ae4055093/19-cl10a106mp8nnnc.pdf, Manufacturer Part Number=CL10A106MP8NNNC, Mounting Type="Surface Mount, MLCC", Size / Dimension="0.063\" L x 0.031\" W (1.60mm x 0.80mm)", Supplier 1=Digi-Key, Thickness (Max)="0.035\" (0.90mm)"
D1 D2 D3: "Schottky Diodes & Rectifiers SMA 40V 1.0A", Package=None, Availability=Unavailable, MP=SS14, Price=None
D4 D5 D6 D7 D8: "LED,  LTST-C191KGKT", Case Code (Imperial)=0603, Case Code (Metric)=1608, Color=Green, Forward Voltage=2V, Lens Color=Colorless, Manufacturer="Vishay Lite-On", Max Operating Temperature=85°C, Max Power Dissipation=75mW, Min Operating Temperature=-55°C, Test Current=20mA, Case/Package=0603, Category=Uncategorized, ComponentLink1description=https://datasheet.ciiva.com/2109/ltst-c191kgkt-2109973.pdf?src-supplier=Digi-Key, ComponentLink1URL=https://datasheet.ciiva.com/2109/ltst-c191kgkt-2109973.pdf?src-supplier=Digi-Key, Dominant Wavelength=571nm, Height=0.65mm, Lead Free="Lead Free", Length=1.6mm, Lens Size=0.8mm, Lens Style=Flat,Rectangular,Colorless, Lens Transparency=Clear, Luminous Intensity=35mcd, Manufacturer Part Number=LTST-C191KGKT, Mount="Surface Mount", Number of LEDs=1, Number of Pins=2, Packaging="Tape and Reel", Pricing="1=0.223, 10=0.1424, 25=0.1365, 100=0.0663, 250=0.0656, 500=0.0612, 1000=0.0451, 2000=0.0464, 3000=0.0448, 5000=0.0403, 10000=0.0363, 25000=0.0323, 50000=0.0316 (USD)", RoHS=Yes, RoHS Compliant=Yes, Series=-, Stock=3111, Supplier 1="Arrow Electronics", Supplier Part Number 1=LTST-C191KGKT, Viewing Angle=130°, Wavelength=574nm, Width=0.8mm
J1: "Headers & Wire Housings 1.5MM PicoLock SMT HDR RA POS SDLCK 11P", Package=None, Availability=Unavailable, MP=5040501191, Price=None
J2 J3 J4 J5 J6: "Headers & Wire Housings PicoLock 1.0 WB Plg R/A 2Ckt Pos SideLk", Package=None, Availability=Unavailable, MP=5037630291, Price=None
J7 J8: library part PCC-SMP-K-5, "Thermocouple Connector, Circuit Board, Socket, Type T, Miniature, PCC SMP Series", Package=None, Availability="No availability data", Check_prices=https://www.snapeda.com/parts/PCC-SMP-K-5/Omega%20Engineering/view-part/2886965/?ref=eda, MF="Omega Engineering", MP=PCC-SMP-K-5, Price=None, SnapEDA_Link=https://www.snapeda.com/parts/PCC-SMP-K-5/Omega%20Engineering/view-part/2886965/?ref=snap
J9: library part SMTC-TSW-106-07-X-D_1, "0.025\" SQ Post Header, Through-hole, Vertical, -55 to 125 degC, 2.54 mm Pitch, 12-Pin, Male, RoHS", Manufacturer=Samtec, Temperature Range="-55 to 125 degC", ComponentLink1description="Manufacturer URL", ComponentLink1URL=http://www.samtec.com, ComponentLink2description=Datasheet, ComponentLink2URL=http://www.samtec.com/documents/webfiles/pdf/TSW_TH.PDF, ComponentLink3Description="Package Specification", ComponentLink3URL=http://www.samtec.com/documents/webfiles/cpdf/TSW-XXX-XX-XXX-X-XX-XXX-MKT.pdf, DatasheetVersion=F-214, Mounting Technology=Through-hole, Orientation=Vertical, PackageDescription=".025[0.64] SQ. Post Terminal Strip Assembly", PackageReference=TSW-106-07-X-D, PackageVersion="DM, 8/1988", PartNumber=TSW-106-07-G-D, Pitch="2.54 mm", RoHS=True
R1 R19 R22: "SMD Chip Resistor, 10 kOhm, ï¿½ 5%, 100 mW, 0603 [1608 Metric], Thick Film, General Purpose", Manufacturer="Panasonic Electronic Components", Operating Temperature="-55°C ~ 155°C", Package="0603 (1608 Metric)", Power  (W)=0.1W, Resistance=10K, Supplier Part Number 1=P10KGCT-ND, Temperature Coefficient=±200ppm/°C, Tolerance=±5%, ComponentLink1description=Datasheet, ComponentLink1URL=https://industrial.panasonic.com/cdbs/www-data/pdf/RDA0000/DMA0000COL11.pdf, ComponentLink2description="Land Pattern", ComponentLink2URL=https://industrial.panasonic.com/cdbs/www-data/pdf/RDA0000/DMA0000COL17.pdf, Composition="Thick Film", Manufacturer Part Number=ERJ-3GEYJ103V, Supplier 1=Digi-Key
R2: library part RT-0R00-F-1/10W-0603, "RES SMD 0 OHM 1% JUMPER 1/10W 0603", Manufacturer="Stackpole Electronics Inc", Manufacturer Part #=RMCF0603ZT0R00, Supplier Part Number 1=3992146, ComponentLink1description=Datasheet, ComponentLink1URL=https://industrial.panasonic.com/ww/products/resistors/chip-resistors/general-purpose-chip-resistors/models/ERJ2GE0R00X, ComponentLink2description="Manufacturer Website", ComponentLink2URL=https://industrial.panasonic.com/ww/products/resistors/chip-resistors/general-purpose-chip-resistors/models/ERJ2GE0R00X, Distributor=Digikey, Distributor Part #=RMCF0603ZT0R00CT-ND, Part Description="0 Ohms Jumper 0.1W, 1/10W Chip Resistor 0603 (1608 Metric) Automotive AEC-Q200 Thick Film", Supplier 1="Future Electronics"
R3: library part RT-0R00-F-1/10W-0603, "RES SMD 0 OHM 1% JUMPER 1/10W 0603", Manufacturer="Stackpole Electronics Inc", Manufacturer Part #=RMCF0603ZT0R00, ComponentLink1description=Datasheet, ComponentLink1URL=https://industrial.panasonic.com/ww/products/resistors/chip-resistors/general-purpose-chip-resistors/models/ERJ2GE0R00X, ComponentLink2description="Manufacturer Website", ComponentLink2URL=https://industrial.panasonic.com/ww/products/resistors/chip-resistors/general-purpose-chip-resistors/models/ERJ2GE0R00X, Distributor=Digikey, Distributor Part #=RMCF0603ZT0R00CT-ND, Part Description="0 Ohms Jumper 0.1W, 1/10W Chip Resistor 0603 (1608 Metric) Automotive AEC-Q200 Thick Film"
R4: library part ERJ-3GEYJ103V, "Thick Film Resistors - SMD 88.7Ohms 1/20W 0201 1%", Manufacturer="Panasonic Electronic Components", Operating Temperature="-55°C ~ 155°C", Package="0603 (1608 Metric)", Power  (W)=0.1W, Resistance=88.7R, Supplier Part Number 1=P10KGCT-ND, Temperature Coefficient=±200ppm/°C, Tolerance=±5%, ComponentLink1description=Datasheet, ComponentLink1URL=https://industrial.panasonic.com/cdbs/www-data/pdf/RDA0000/DMA0000COL11.pdf, ComponentLink2description="Land Pattern", ComponentLink2URL=https://industrial.panasonic.com/cdbs/www-data/pdf/RDA0000/DMA0000COL17.pdf, Composition="Thick Film", Manufacturer Part Number=ERJ-3GEYJ103V, Supplier 1=Digi-Key
R5: library part ERJ-3EKF38R3V, "Thick Film Resistors - SMD 0603 22.1ohms 0.2W 1% AEC-Q200", Case Code (Imperial)=0603, Case Code (Metric)=1608, Manufacturer=Panasonic, Max Operating Temperature=155°C, Max Power Dissipation=100mW, Min Operating Temperature=-55°C, Package Quantity=1, Resistance=22.1R, Resistance Tolerance=1%, Resistor Type="Thick Film", Supplier Part Number 1=01AC1806, Temperature Coefficient=100ppm/°C, Voltage Rating=75V, Voltage Rating (DC)=50V, Case/Package=0603, Category="Chip SMD Resistors", ComponentLink1description=https://datasheet.ciiva.com/22760/1678782-22760701.pdf?src-supplier=Farnell, ComponentLink1URL=https://datasheet.ciiva.com/22760/1678782-22760701.pdf?src-supplier=Farnell, ComponentLink2description=https://datasheet.ciiva.com/22741/1678782-22741961.pdf?src-supplier=Element14, ComponentLink2URL=https://datasheet.ciiva.com/22741/1678782-22741961.pdf?src-supplier=Element14, ComponentLink3Description=https://datasheet.ciiva.com/24165/aoa0000ce2-24165276.pdf?src-supplier=Mouser, ComponentLink3URL=https://datasheet.ciiva.com/24165/aoa0000ce2-24165276.pdf?src-supplier=Mouser, Construction=Rectangular, Contact Plating=Tin, Depth=0.8mm, Features="Automotive AEC-Q200", Height=0.022inch, Lead Free="Lead Free", Length=0.063inch, Manufacturer Part Number=ERJ-3EKF38R3V, Military Standard=Not, Mount="Surface Mount", Number of Terminations=2, Packaging="Tape and Reel", Power Rating=100mW, Pricing="10=0.04200, 25=0.03500, 50=0.02700, 100=0.01800 (CAD)", Reach SVHC Compliant=Yes, RoHS=Yes, RoHS Compliant=Yes, Series=ERJ, Stock=83770, Supplier 1=Newark, Termination=SMD/SMT, Tolerance=1%, Weight=7.1E-05oz, Width=0.8mm
R6: "Res Wirewound 2010 5 Ohm 5% 1/2W ±50ppm/°C Molded SMD SMD T/R", Case Code (Imperial)=2010, Case Code (Metric)=5025, Manufacturer=Bourns, Max Operating Temperature=155°C, Max Power Dissipation=500mW, Min Operating Temperature=-55°C, Package Quantity=1, Resistance=5R, Resistance Tolerance=5%, Resistor Type=Wirewound, Supplier Part Number 1=05R8093, Temperature Coefficient=50ppm/°C, Threshold Voltage=1.6V, Case/Package=2010, Category="Chip SMD Resistors", ComponentLink1description=https://datasheet.ciiva.com/7986/1727932-7986277.pdf?src-supplier=Element14, ComponentLink1URL=https://datasheet.ciiva.com/7986/1727932-7986277.pdf?src-supplier=Element14, ComponentLink2description=https://datasheet.ciiva.com/22713/1727932-22713400.pdf?src-supplier=Element14, ComponentLink2URL=https://datasheet.ciiva.com/22713/1727932-22713400.pdf?src-supplier=Element14, ComponentLink3Description=https://datasheet.ciiva.com/9122/pwr2010-9122735.pdf?src-supplier=Avnet, ComponentLink3URL=https://datasheet.ciiva.com/9122/pwr2010-9122735.pdf?src-supplier=Avnet, ComponentLink4Description=https://datasheet.ciiva.com/15865/pwr2010-15865624.pdf?src-supplier=Onlinecomponents.com, ComponentLink4URL=https://datasheet.ciiva.com/15865/pwr2010-15865624.pdf?src-supplier=Onlinecomponents.com, ComponentLink5Description=https://datasheet.ciiva.com/2484/pwr2010-2484257.pdf?src-supplier=Digi-Key, ComponentLink5URL=https://datasheet.ciiva.com/2484/pwr2010-2484257.pdf?src-supplier=Digi-Key, ComponentLink6Description=https://datasheet.ciiva.com/2484/pwr2010-2484258.pdf?src-supplier=Digi-Key, ComponentLink6URL=https://datasheet.ciiva.com/2484/pwr2010-2484258.pdf?src-supplier=Digi-Key, ComponentLink7Description=https://datasheet.ciiva.com/2484/pwr2010-2484256.pdf?src-supplier=Digi-Key, ComponentLink7URL=https://datasheet.ciiva.com/2484/pwr2010-2484256.pdf?src-supplier=Digi-Key, Depth=2.54mm, Height=0.148inch, Length=0.2inch, Manufacturer Part Number=PWR2010W5R00JE, Military Standard=Not, Mount="Surface Mount", Number of Pins=2, Number of Terminations=2, Packaging="Cut Tape", Power Rating=500mW, Pricing="1=0.68700, 10=0.68700, 25=0.68700, 50=0.68700, 100=0.68700, 250=0.68700 (CAD)", Reach SVHC Compliant=Yes, RoHS=Yes, Series=PWR2010, Stock=26, Supplier 1=Newark, Technology="WIRE WOUND", Termination=Solder, Tolerance=5%, Width=0.1inch
R12 R13 R14 R16: library part RC0603FR-071KL, "Thin Film Resistors - SMD 500 ohm 0.1% 15ppm H igh Stability", Case Code (Imperial)=0603, Case Code (Metric)=1608, Manufacturer=Yageo, Max Operating Temperature=155°C, Max Power Dissipation=100mW, Min Operating Temperature=-55°C, Resistance=500R, Resistance Tolerance=1%, Resistor Type="Thick Film", Supplier Part Number 1=4016291, Temperature Coefficient=100ppm/°C, Voltage Rating=50V, Case/Package=0603, Category="Chip SMD Resistors", ComponentLink1description=https://datasheet.ciiva.com/11808/0900766b80f96399-11808081.pdf?src-supplier=Rs, ComponentLink1URL=https://datasheet.ciiva.com/11808/0900766b80f96399-11808081.pdf?src-supplier=Rs, ComponentLink2description=https://datasheet.ciiva.com/7746/1686128-7746280.pdf?src-supplier=Element14, ComponentLink2URL=https://datasheet.ciiva.com/7746/1686128-7746280.pdf?src-supplier=Element14, ComponentLink3Description=https://datasheet.ciiva.com/7660/1868787-7660790.pdf?src-supplier=Element14, ComponentLink3URL=https://datasheet.ciiva.com/7660/1868787-7660790.pdf?src-supplier=Element14, ComponentLink4Description=https://datasheet.ciiva.com/7983/443971-7983613.pdf?src-supplier=Element14, ComponentLink4URL=https://datasheet.ciiva.com/7983/443971-7983613.pdf?src-supplier=Element14, ComponentLink5Description=https://datasheet.ciiva.com/7746/1738695-7746281.pdf?src-supplier=Element14, ComponentLink5URL=https://datasheet.ciiva.com/7746/1738695-7746281.pdf?src-supplier=Element14, ComponentLink6Description=https://datasheet.ciiva.com/7746/1738695-7746279.pdf?src-supplier=Element14, ComponentLink6URL=https://datasheet.ciiva.com/7746/1738695-7746279.pdf?src-supplier=Element14, ComponentLink7Description=https://datasheet.ciiva.com/8896/pyu-rc0603-51-rohs-l-4-8896106.pdf?src-supplier=Avnet, ComponentLink7URL=https://datasheet.ciiva.com/8896/pyu-rc0603-51-rohs-l-4-8896106.pdf?src-supplier=Avnet, ComponentLink8Description=https://datasheet.ciiva.com/15189/getdatasheetpartid-404327-15189644.pdf?src-supplier=Verical, ComponentLink8URL=https://datasheet.ciiva.com/15189/getdatasheetpartid-404327-15189644.pdf?src-supplier=Verical, Construction=Rectangular, Contact Plating=Tin,Matte, Depth=0.8mm, Features="Moisture Resistant", Height=0.45mm, Lead Free="Lead Free", Length=1.6mm, Manufacturer Part Number=RC0603FR-071KL, Military Standard=Not, Number of Terminations=2, Packaging="Tape and Reel", Power Rating=100mW, Pricing="5000=0.0015, 50000=0.0014, 200000=0.0014, 625000=0.0013, 2000000=0.0012 (USD)", Reach SVHC Compliant=No, RoHS=Yes, RoHS Compliant=Yes, Series=RC, Size Code=0603, Stock=11600000, Supplier 1="Future Electronics", Technology="THICK FILM", Termination=SMD/SMT, Tolerance=1%
R15: library part CRGCQ0402J330R, "Thick Film Resistors - SMD 0603 100ohms 0.2W 1% AEC-Q200", Case Code (Imperial)=0402, Case Code (Metric)=1005, Manufacturer="TE Connectivity", Max Operating Temperature=155°C, Max Power Dissipation=63mW, Min Operating Temperature=-55°C, Ratings=AEC-Q200, Resistance=100R, Temperature Coefficient=100ppm/°C, Tolerance=5%, Case/Package=0402, Category="Chip SMD Resistors", ComponentLink1description=https://4donline.ihs.com/images/VipMasterIC/IC/TYEL/TYEL-S-A0004929575/TYEL-S-A0004929575-1.pdf?hkey=52A5661711E402568146F3353EA87419&src-supplier=Newark, ComponentLink1URL=https://4donline.ihs.com/images/VipMasterIC/IC/TYEL/TYEL-S-A0004929575/TYEL-S-A0004929575-1.pdf?hkey=52A5661711E402568146F3353EA87419&src-supplier=Newark, ComponentLink2description=https://www.te.com/commerce/DocumentDelivery/DDEController?Action=srchrtrv&amp;DocNm=1773204-3&amp;DocType=DS&amp;DocLang=English&src-supplier=Digi-Key, ComponentLink2URL=https://www.te.com/commerce/DocumentDelivery/DDEController?Action=srchrtrv&amp;DocNm=1773204-3&amp;DocType=DS&amp;DocLang=English&src-supplier=Digi-Key, ComponentLink3Description=https://4donline.ihs.com/images/VipMasterIC/IC/TYEL/TYEL-S-A0004929575/TYEL-S-A0004929575-1.pdf?hkey=52A5661711E402568146F3353EA87419&src-supplier=Farnell, ComponentLink3URL=https://4donline.ihs.com/images/VipMasterIC/IC/TYEL/TYEL-S-A0004929575/TYEL-S-A0004929575-1.pdf?hkey=52A5661711E402568146F3353EA87419&src-supplier=Farnell, Features="Moisture Resistant,Automotive AEC-Q200", Manufacturer Part Number=CRGCQ0402J330R, Number of Terminations=2, Packaging="Cut Tape", Pricing="1=0.0576, 10=0.0086, 100=0.0034, 250=0.0033, 500=0.0032, 1000=0.0018, 3000=0.0017, 6000=0.0016, 15000=0.0015 (USD)", RoHS=Yes, RoHS Compliant=Yes, Series=CRGCQ, Stock=20410, Supplier 1="Arrow Electronics", Supplier Part Number 1=CRGCQ0402J330R
R18 R21: library part PWR2010W5R00JE, "Thick Film Resistors - SMD 0603 1.3KOhm 1% AEC-Q200", Case Code (Imperial)=2010, Case Code (Metric)=5025, Manufacturer=Bourns, Max Operating Temperature=155°C, Max Power Dissipation=500mW, Min Operating Temperature=-55°C, Package Quantity=1, Resistance=1.3K, Resistance Tolerance=5%, Resistor Type=Wirewound, Supplier Part Number 1=05R8093, Temperature Coefficient=50ppm/°C, Threshold Voltage=1.6V, Case/Package=2010, Category="Chip SMD Resistors", ComponentLink1description=https://datasheet.ciiva.com/7986/1727932-7986277.pdf?src-supplier=Element14, ComponentLink1URL=https://datasheet.ciiva.com/7986/1727932-7986277.pdf?src-supplier=Element14, ComponentLink2description=https://datasheet.ciiva.com/22713/1727932-22713400.pdf?src-supplier=Element14, ComponentLink2URL=https://datasheet.ciiva.com/22713/1727932-22713400.pdf?src-supplier=Element14, ComponentLink3Description=https://datasheet.ciiva.com/9122/pwr2010-9122735.pdf?src-supplier=Avnet, ComponentLink3URL=https://datasheet.ciiva.com/9122/pwr2010-9122735.pdf?src-supplier=Avnet, ComponentLink4Description=https://datasheet.ciiva.com/15865/pwr2010-15865624.pdf?src-supplier=Onlinecomponents.com, ComponentLink4URL=https://datasheet.ciiva.com/15865/pwr2010-15865624.pdf?src-supplier=Onlinecomponents.com, ComponentLink5Description=https://datasheet.ciiva.com/2484/pwr2010-2484257.pdf?src-supplier=Digi-Key, ComponentLink5URL=https://datasheet.ciiva.com/2484/pwr2010-2484257.pdf?src-supplier=Digi-Key, ComponentLink6Description=https://datasheet.ciiva.com/2484/pwr2010-2484258.pdf?src-supplier=Digi-Key, ComponentLink6URL=https://datasheet.ciiva.com/2484/pwr2010-2484258.pdf?src-supplier=Digi-Key, ComponentLink7Description=https://datasheet.ciiva.com/2484/pwr2010-2484256.pdf?src-supplier=Digi-Key, ComponentLink7URL=https://datasheet.ciiva.com/2484/pwr2010-2484256.pdf?src-supplier=Digi-Key, Depth=2.54mm, Height=0.148inch, Length=0.2inch, Manufacturer Part Number=PWR2010W5R00JE, Military Standard=Not, Mount="Surface Mount", Number of Pins=2, Number of Terminations=2, Packaging="Cut Tape", Power Rating=500mW, Pricing="1=0.68700, 10=0.68700, 25=0.68700, 50=0.68700, 100=0.68700, 250=0.68700 (CAD)", Reach SVHC Compliant=Yes, RoHS=Yes, Series=PWR2010, Stock=26, Supplier 1=Newark, Technology="WIRE WOUND", Termination=Solder, Tolerance=5%, Width=0.1inch
R20 R23: library part ERJ-3GEYJ103V, "Current Sense Resistors - SMD 0603 3.0ohm 1% Curr Sense AEC-Q200", Manufacturer="Panasonic Electronic Components", Operating Temperature="-55°C ~ 155°C", Package="0603 (1608 Metric)", Power  (W)=0.1W, Resistance=3R, Supplier Part Number 1=P10KGCT-ND, Temperature Coefficient=±200ppm/°C, Tolerance=±5%, ComponentLink1description=Datasheet, ComponentLink1URL=https://industrial.panasonic.com/cdbs/www-data/pdf/RDA0000/DMA0000COL11.pdf, ComponentLink2description="Land Pattern", ComponentLink2URL=https://industrial.panasonic.com/cdbs/www-data/pdf/RDA0000/DMA0000COL17.pdf, Composition="Thick Film", Manufacturer Part Number=ERJ-3GEYJ103V, Supplier 1=Digi-Key
U1 U2: library part MAX31855-S8+4_1, "Cold Junction Compensated Thermocouple to Digital Converter, 14 Bits Temperature Resolution, -40 to 125 degC, 8-Pin SOIC (S8+4), Pb-Free, Tape ang Reel", Generic Part Number=MAX31855, Supplier Part Number 1=700-MAX31855KASA+T, Code_JEDEC=MS-012, ComponentLink1description="Manufacturer URL", ComponentLink1URL=http://www.maximintegrated.com/, ComponentLink2description=Datasheet, ComponentLink2URL=http://datasheets.maximintegrated.com/en/ds/MAX31855.pdf, ComponentLink3Description="Package Specification", ComponentLink3URL=http://pdfserv.maximintegrated.com/package_dwgs/21-0041.PDF, DatasheetVersion="Rev. 2", Functions="Thermocouple-to-Digital Converter", Interface=SPI, Mounting Technology="Surface Mount", PackageDescription="8-Pin Small-Outline IC, Narrow, Body 3.9 x 4.9 mm, Pitch 1.27 mm", PackageReference=S8+4, PackageVersion="Rev. D, 10/2012", Packing="Tape ang Reel", Parasite Pwr.=No, PartNumber=MAX31855KASA+T, Supplier 1=Mouser
U3: "IC MCU 32BIT 1MB FLASH 64LQFP", Manufacturer=STMicroelectronics, Operating Temperature="-40°C ~ 85°C (TA)", Package / Case=64-LQFP, Supplier Part Number 1=497-11767-ND, Voltage - Supply (VDD)="1.8V ~ 3.6V", ComponentLink1description=Datasheet, ComponentLink1URL=https://www.st.com/content/ccc/resource/technical/document/datasheet/ef/92/76/6d/bb/c2/4f/f7/DM00037051.pdf/files/DM00037051.pdf/jcr:content/translations/en.DM00037051.pdf, Connectivity="CANbus, I²C, IrDA, LINbus, SPI, UART/USART, USB OTG", Core Processor="ARM® Cortex®-M4", Core Size=32-Bit, Data Converters="A/D 16x12b; D/A 2x12b", Manufacturer Part Number=STM32F405RGT6, Mounting Type="Surface Mount", Number of I/O=51, Oscillator Type=Internal, Peripherals="Brown-out Detect/Reset, DMA, I²S, LCD, POR, PWM, WDT", Program Memory Size="1MB (1M x 8)", Program Memory Type=FLASH, RAM Size="192K x 8", Speed=168MHz, Supplier 1=Digi-Key
U4: "3.3V, Full-Duplex RS-485, 16kV IEC ESD, 50Mbps data rate, No Enables 8-SOIC -40 to 125", Mfr_Name="Texas Instruments", Copyright="Copyright (C) 2022 Ultra Librarian. All rights reserved.", Manufacturer_Part_Number=SN65HVD1477DR, RefDes=RefDes, Type=DEV
U5 U6: "No Description Available", Mfr_Name=STMicroelectronics, RefDes=RefDes, Type=Type
Y1: library part CMP-25149-000010-1, "MEMS OSC XO 8.0000MHZ LVCM LVTTL"

## Free pads (board coordinates)
  round 3.264 hole 3.264 unplated: MH(5.08,5.08) MH(5.08,17.78) MH(5.08,58.42) MH(5.08,71.12) MH(83.82,5.08) MH(83.82,17.78) MH(83.82,58.42) MH(83.82,71.12)

## Via types
v1: diameter 0.6, hole 0.3, Top Layer to Bottom Layer, tented both sides, 201 vias
v2: diameter 0.5, hole 0.25, Top Layer to Bottom Layer, 2 vias

## Nets (pads, with @x,y where several pads share a name; then routed paths per layer and width w, separated by ;. In a path a pad name is that pad's centre, name@x,y a point inside that pad or via, vN(x,y) a via of type N, cw(c..) or ccw(c..) an arc to the next point about the centre after c; other vN are vias at no path point)
+3V3: C2.1 C4.1 C5.1 C10.1 C13.1 C16.1 C17.1 C18.1 C19.1 C20.1 C21.1 C22.1 J1.6 J9.2 R1.2 R6.2 R15.1 U1.U4 U2.U4 U3.1 U3.13 U3.19 U3.32 U3.48 U3.64 U4.1 U5.3 U6.3 | length 37.2
  Top Layer w0.25: C18.1@27.051,30.124 27.141,30.215 U3.48 ; C16.1@30.074,41.326 30.339,41.06 U3.32 ; C17.1@36.425,41.173 C17.1 ; C17.1@36.435,41.173 36.839,40.769 U3.19 ; U3.64 37.839,27.54 38.052,27.328 38.052,26.895 C19.1@38.327,26.619 ; U5.3 39.216,48.351 U5.3@39.268,48.404 ; U3.1 39.776,30.215 40.639,30.215 ; U3.13 40.577,36.215 ; C4.1@53.01,24.49 C4.1
  Top Layer w0.3: 40.577,36.215 40.733,36.371
  Top Layer w0.4: v1(24.13,25.248) 24.13,24.465 C2.1 ; v1(28.448,29.489) U3.48@28.448,30.101 ; v1(29.642,39.548) U3.32@30.264,39.548 ; v1(35.357,41.173) C17.1@36.425,41.173 ; U3.64@37.95,28.296 v1(38.506,28.296) ; v1(38.278,49.886) 38.297,49.905 39.34,49.905 C10.1 ; U5.3@39.268,48.404 C10.1@39.268,49.835 ; v1(39.624,29.515) U3.1@39.624,30.1 ; 40.733,36.371 C21.1@41.418,36.371 ; C21.1 41.689,36.64 41.999,36.33 42.331,36.33 42.745,35.916 v1(42.799,35.916) ; C21.1@41.693,36.646 41.939,36.892 43.339,36.892 ; v1(41.859,29.108) 41.859,29.905 C20.1 ; C22.1@43.892,36.651 v1(44.983,36.652) ; C4.1@53.01,24.49 v1(53.01,25.197) ; v1(55.093,49.911) 55.112,49.93 56.155,49.93 C13.1@56.186,49.962 ; U6.3@56.109,48.379 C13.1@56.109,49.809
  Top Layer w0.5: R1.2 v1(20.32,48.895) ; 40.639,30.215 C20.1@41.589,30.215
  Top Layer w0.55: v1(23.368,62.611) J1.6 ; v1(67.97,34.188) 67.98,34.198 68.906,34.198 R15.1@68.938,34.23
  Top Layer w0.6: v1(22.86,22.631) 22.86,22.972 22.301,23.531 U1.U4 C2.1@23.689,24.181 ; v1(51.638,22.708) 51.638,23.099 51.206,23.531 U2.U4 51.206,24 C4.1@52.65,24
  other v1: 56.566,28.372 58.115,28.372 53.848,28.397 55.245,28.423 53.848,29.413 58.115,29.439 53.848,30.404 58.115,30.404 14.199,52.4 15.037,52.4 14.224,53.264 15.062,53.264 14.224,54.153 15.062,54.153 14.224,54.991 15.062,54.991
+12: J1.4 J2.1 J3.1 R16.1 | length 4.9
  Top Layer w0.5: v1@39.4,52.43 J2.1 ; v1(56.261,52.476) 56.255,52.482 56.255,53.554 J3.1@56.261,53.56
  Top Layer w0.55: v1(49.784,53.95) 49.784,53.936 49.808,53.912 R16.1
  Top Layer w0.6: J1.4 26.368,63.605 v1(26.375,62.225)
  other v1: 39.395,52.426
CONDUIT_RX: R2.1 U3.43 | length 18.7
  Top Layer w0.25: R2.1 17.78,45.815 17.78,41.072 26.137,32.715 U3.43@28.296,32.715
CONDUIT_TX: R3.1 U3.42 | length 23
  Top Layer w0.25: R3.1@20.599,52.434 22.936,50.097 22.936,38.056 27.778,33.215 U3.42
DEBUG_RX: J9.7 U3.30 | length 60.2
  Top Layer w0.25: v1(31.14,37.465) 31.14,38.298 31.339,38.497 U3.30
  Bottom Layer w0.25: v1(31.14,37.465) 31.15,37.475 56.683,37.475 72.861,21.297 74.328,19.83 74.328,17.755 74.328,13.775 73.33,12.776 J9.7@73.177,12.776
DEBUG_TX: J9.5 U3.29 | length 63.9
  Top Layer w0.25: v1(31.826,38.1) 31.839,38.113 U3.29
  Bottom Layer w0.25: v1(31.826,38.1) 57.353,38.1 76.225,19.228 76.225,13.132 J9.5@73.254,10.16
GND: C2.2 C4.2 C5.2 C6.1 C7.1 C8.2 C9.2 C10.2 C11.2 C12.2 C13.2 C14.2 C15.1 C16.2 C17.2 C18.2 C19.2 C20.2 C21.2 C22.2 D1.A D2.A D3.A D4.1 D5.1 D6.1 D7.1 D8.1 J1.5 J1.7 J1.S1 J1.S2 J2.S2 J3.S2 J4.2 J4.S2 J5.2 J5.S2 J6.2 J6.S2 J7.S1 J7.S2 J8.S1 J8.S2 J9.3 J9.6 R19.1 R20.2 R22.1 R23.2 U1.U1 U2.U1 U3.12 U3.18 U3.60 U3.63 U4.4 U5.2 U5.5 U6.2 U6.5 Y1.1 Y1.2 | length 202.7
  Top Layer w0.25: v1@0.875,12.686 v1@0.875,15.799 ; v1@0.875,18.578 v1@0.875,21.692 ; v1@0.875,24.471 v1@0.875,27.584 ; v1@0.875,30.364 v1@0.875,33.477 ; v1@0.875,36.257 v1@0.875,39.37 ; v1@0.875,42.15 v1@0.875,45.263 ; v1@0.875,48.042 v1@0.875,51.156 ; v1@0.875,53.935 v1@0.875,57.048 ; v1@0.875,59.853 v1@0.875,62.967 ; v1@0.875,65.746 v1@0.875,68.859 ; v1@0.875,71.639 v1@0.875,74.752 ; v1(0.9,0.9) v1(0.9,4) v1@0.9,4.013 ; v1(0.9,6.793) v1(0.9,9.893) v1@0.9,9.906 ; v1(2.731,75.3) v1(5.831,75.3) ; v1(5.484,0.9) v1(8.584,0.9) ; v1(9.919,75.3) v1(13.019,75.3) ; v1(17.117,75.3) v1(20.217,75.3) ; v1@24.296,75.294 v1@27.396,75.294 ; v1@31.484,75.294 v1@34.584,75.294 ; v1(33.805,0.9) v1(36.905,0.9) ; v1(35.839,27.219) U3.60 ; C19.2@36.892,26.645 37.186,26.938 37.186,27.381 37.339,27.535 U3.63 ; U3.18 37.339,40.678 37.821,41.16 C17.2@37.821,41.173 ; v1(38.682,75.3) v1(41.782,75.3) ; U3.12 40.539,35.715 ; C10.2@40.935,49.958 C10.2@40.94,49.962 ; v1@45.86,75.294 v1@48.96,75.294 ; v1@53.074,75.294 v1@56.174,75.294 ; v1@60.272,0.849 v1@63.372,0.849 ; v1(60.272,75.3) v1(63.372,75.3) ; v1@67.45,75.294 v1@70.55,75.294 ; v1@67.485,0.849 v1@70.585,0.849 ; v1@74.664,75.294 v1@77.764,75.294 ; v1@74.699,0.875 v1@77.799,0.875 ; v1(81.862,75.3) v1(84.962,75.3) ; v1(81.913,0.9) v1(85.013,0.9) ; v1@87.975,12.686 v1@87.975,15.799 ; v1@87.975,18.578 v1@87.975,21.692 ; v1@87.975,24.471 v1@87.975,27.584 ; v1@87.975,30.364 v1@87.975,33.477 ; v1@87.975,36.257 v1@87.975,39.37 ; v1@87.975,42.15 v1@87.975,45.263 ; v1@87.975,48.042 v1@87.975,51.156 ; v1@87.975,53.935 v1@87.975,57.048 ; v1@87.975,59.853 v1@87.975,62.967 ; v1@87.975,65.746 v1@87.975,68.859 ; v1@87.975,71.639 v1@87.975,74.752 ; v1(88,0.9) v1(88,4) v1@88,4.013 ; v1(88,6.793) v1(88,9.893) v1@88,9.906
  Top Layer w0.3: 40.539,35.715 40.789,35.465
  Top Layer w0.35: v1(35.585,48.158) 36.043,47.701 U5.5 ; U5.2 39.929,47.701 v1(40.386,48.158) ; v1(52.426,48.158) 52.883,47.701 U6.5@53.721,47.701 ; U6.2@55.944,47.701 56.769,47.701 v1(57.226,48.158)
  Top Layer w0.4: v1(16.46,49.799) C5.2@16.46,50.852 ; v1(18.491,22.758) U1.U1 ; U4.4@20.313,54.505 20.319,54.5 v1(21.05,54.5) ; v1(24.257,29.794) 24.282,29.82 25.325,29.82 C18.2 ; v1(24.257,31.42) 24.27,31.432 25.166,31.432 C14.2@25.179,31.42 ; C2.2@25.917,24.155 v1(26.721,24.155) ; v1(29.921,43.815) 29.947,43.79 29.947,42.747 C16.2 ; v1(31.623,43.815) 31.636,43.802 31.636,42.539 C15.1@31.638,42.537 ; v1(34.011,49.911) R20.2 ; R19.1@35.564,43.251 35.569,43.256 v1(36.398,43.256) ; C8.2@35.62,44.983 35.64,45.004 36.403,45.004 v1(36.424,45.024) ; v1(36.83,25.527) 36.856,25.553 C19.2@36.856,26.619 ; C17.2@38.211,41.199 v1(39.04,41.199) ; 40.789,35.465 41.433,35.465 C21.2@41.689,35.209 ; C10.2@40.94,49.962 v1(41.935,49.962) ; C21.2 41.707,34.86 v1(41.707,34.061) ; C20.2@43.639,30.215 44.475,30.215 v1(44.475,30.2) ; C22.2@44.083,35.18 v1(44.983,35.179) ; U2.U1 47.396,22.85 v1(47.4,22.85) ; v1(50.876,49.886) R23.2 ; R22.1@52.384,43.078 v1(53.238,43.078) ; C11.2@52.409,44.907 52.422,44.92 53.276,44.92 v1(53.289,44.933) ; C4.2@54.778,24.107 54.78,24.105 v1(55.601,24.105) ; C13.2@57.658,50.115 57.849,49.924 58.737,49.924 v1(58.75,49.911) ; v1(68.707,56.49) 69.825,56.49 J6.S2 ; v1(69.025,50.85) 70.581,50.85 D3.A ; v1(73.762,35.103) 73.763,35.102 73.763,34.232 D7.1 ; D6.1 v1(78.931,55.055)
  Top Layer w0.5: J1.7 21.868,62.682 v1(21.875,62.675) ; J1.5 24.868,62.657 v1(24.875,62.65) ; J1.S1 33.49,69.012 v1(34.773,69.012) ; v1(34.773,56.464) J2.S2@35.986,56.464 ; C9.2@42.188,46.711 42.2,46.723 43.243,46.723 v1(43.256,46.711) ; v1(43.282,68.072) J4.S2 ; v1(43.625,62.45) 43.634,62.459 D1.A ; v1(44.205,52.848) D8.1 ; v1(47.498,55.753) 47.511,55.766 47.511,56.667 D4.1 ; v1(51.689,56.49) J3.S2@52.902,56.49 ; C12.2@59.066,46.749 60.109,46.749 v1(60.122,46.736) ; v1(60.223,68.021) 60.243,68.04 61.309,68.04 J5.S2 ; v1(60.45,62.625) 60.464,62.611 D2.A ; D5.1 64.859,56.743 64.859,55.816 v1(64.872,55.804) ; D3.A@71.025,50.9 71.025,50.935 72.225,52.135 J6.2
  Top Layer w0.55: D1.A@45.781,62.75 46.825,63.794 J4.2 ; D2.A@62.669,62.925 63.716,63.972 J5.2
  Top Layer w0.6: J2.S2@35.986,56.464 J2.S2